# Altium PCB PZEM-004T.PcbDoc
Units mil, origin at the board's own origin, x right, y up, seen from the top; angles counter-clockwise.
Board outline 1850 x 840 mil, 2 copper layers (Top Layer, Bottom Layer); 45 components, 30 nets, 119 pads, 0 vias.
Unrouted connection lines stored in the file: 83.
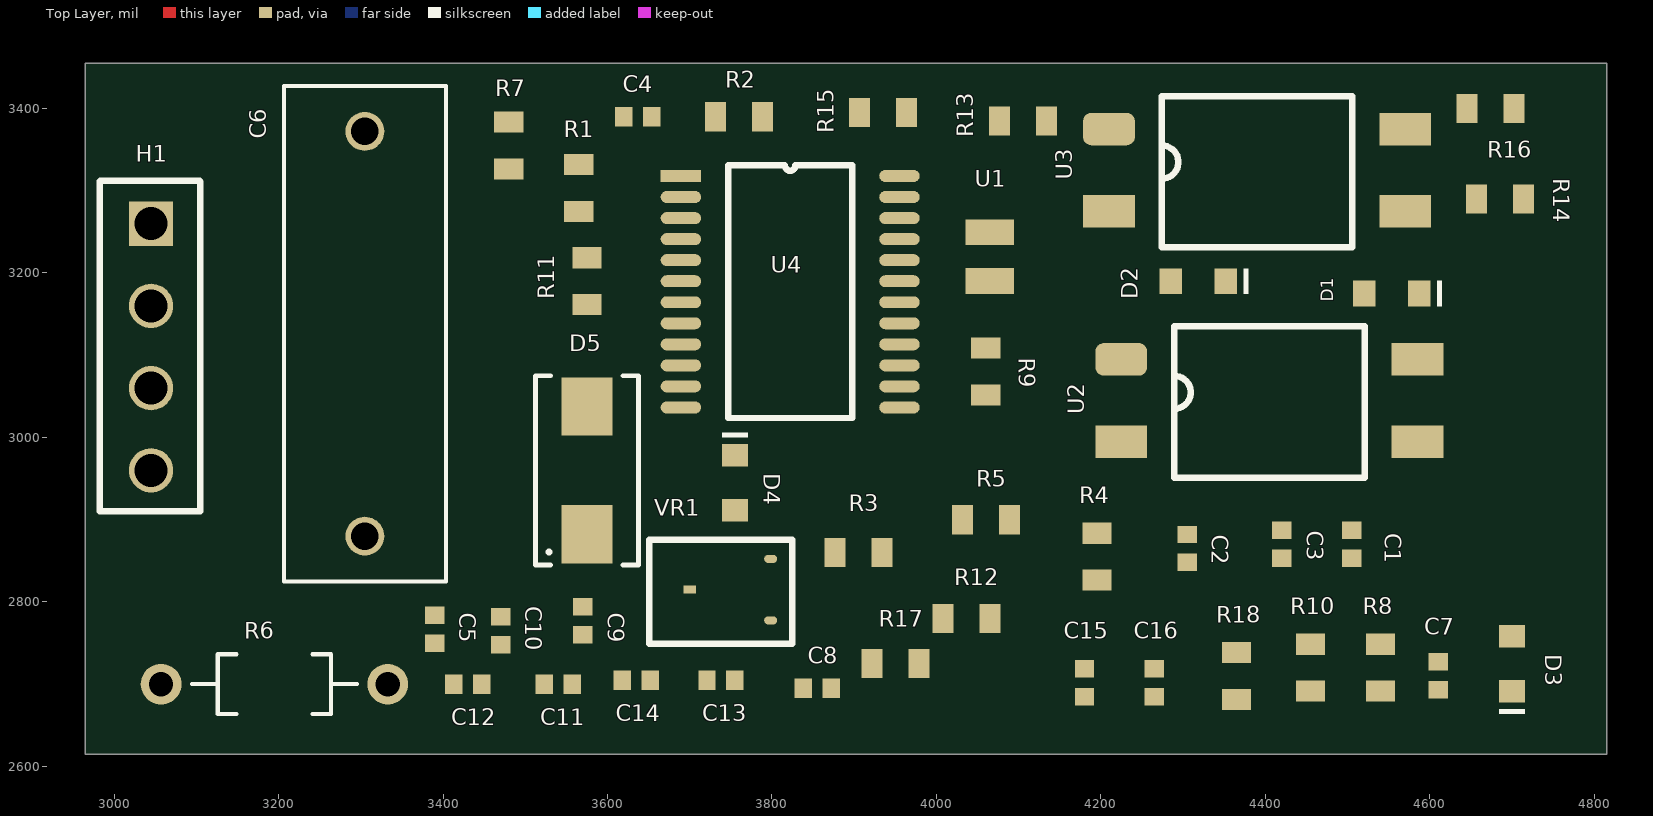
[diagram p0: Top Layer view]
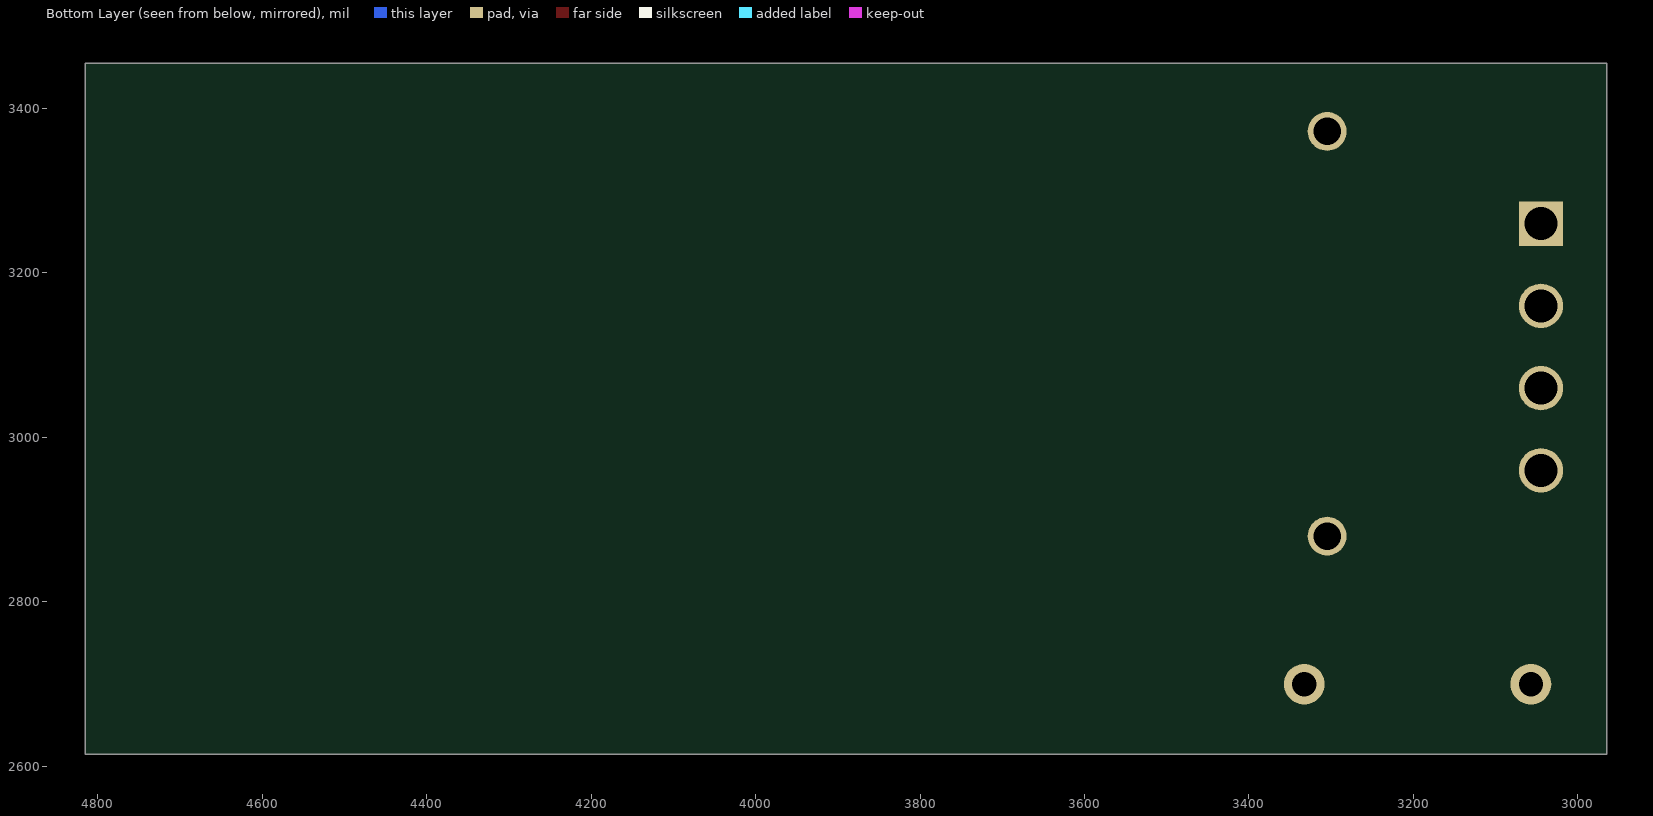
[diagram p1: Bottom Layer view, seen from below]

## Layer stack, top to bottom
Top Solder: solder mask 0.4, Solder Resist, Dk 3.5
Top Layer: signal copper 1.4
Dielectric 1: dielectric 12.6, FR-4, Dk 4.8
Bottom Layer: signal copper 1.4
Bottom Solder: solder mask 0.4, Solder Resist, Dk 3.5

## Board outline
2965,2615 2965,3455 4815,3455 4815,2615

## Design rules (kind name [scope] priority, off if disabled: settings)
Clearance [All] p1: gap=10 ignorepadtopadclearanceinfootprint=FALSE
PolygonConnect [All] p1: connectstyle=Relief reliefconductorwidth=10 reliefentries=4 polygonreliefangle="90 Angle" airgapwidth=10
RoutingVias [All] p1: holewidth=28 width=50 viastyle="Through Hole" minholewidth=5 minwidth=5 maxholewidth=28 maxwidth=50
SolderMaskExpansion [All] p1: expansion=4 istentingtop=FALSE
SupplyNets "Schematic Supply Nets" [InNet('CONN')] p1: voltage=0.000
Width [All] p1: maxlimit=10 minlimit=10 preferedwidth=10
30 further rules are at their usual default settings.

## Components (designator, comment, footprint, x,y, rotation, side; value= is the part's Value field where it differs from the comment)
C1 "10uf" CAPC1005X55N 4505,2870 r270 top
C2 "10uf" CAPC1005X55N 4305,2865 r90 top
C3 "10uf" CAPC1005X55N 4420,2870 r90 top
C4 "1uf" CAPC1005X55N 3637.01,3390 r180 top
C5 "10uf" CAPC1005X55N 3390,2767.01 r270 top
C6 "0.47nf" CAPRR1250W60L1530T500H1150 3305,3126.06 r90 top
C7 "470nf" CAPC1005X55N 4610,2710 r270 top
C8 "10uf" CAPC1005X55N 3855,2695 r0 top
C9 "4.7uf" CAPC1005X55N 3570,2777.01 r90 top
C10 "0.1uf" CAPC1005X55N 3470,2765 r90 top
C11 "10uf" CAPC1005X55N 3540,2700 r180 top
C12 "10uf" CAPC1005X55N 3430,2700 r0 top
C13 "10uf" CAPC1005X55N 3737.99,2705 r0 top
C14 "470uf" CAPC1005X55N 3635,2705 r0 top
C15 "10uf" CAPC1005X55N 4180,2702.01 r90 top
C16 "10uf" CAPC1005X55N 4265,2702.01 r90 top
D1 "LED_" WL-SMCW_0603_150060xx8x000 4553.46,3175 r180 top
D2 "LED_" WL-SMCW_0603_150060xx8x000 4318.47,3190 r180 top
D3 "LED_" WL-SMCW_0603_150060xx8x000 4700,2725 r90 top
D4 "dIODE" WL-SMCW_0603_150060xx8x000 3755,2945 r270 top
D5 "12 V" SMA_DIO-L 3575,2960 r90 top
H1 "HEADER X 4" DIP4 3045,3260 r0 top
R1 "100R" RESISTOR 3565,3303.54 r90 top
R2 "0.05R" RESISTOR 3760,3390 r180 top
R3 "210R" RESISTOR 3905,2860 r180 top
R4 "100R" RESISTOR 4195,2855 r270 top
R5 "1K" RESISTOR 4060,2900 r0 top
R6 "1M" RESAD700W45L350D185 3195,2700 r0 top
R7 "750R" RESISTOR 3480,3355 r90 top
R8 "470K" RESISTOR 4540,2720 r90 top
R9 "10K" RESISTOR 4060,3080 r270 top
R10 "100R" RESISTOR 4455,2720 r270 top
R11 "10k" RESISTOR 3575,3190 r270 top
R12 "4.7K" RESISTOR 4036.46,2780 r0 top
R13 "1K" RESISTOR 4105,3385 r0 top
R14 "1K" RESISTOR 4685,3290 r0 top
R15 "1K" RESISTOR 3935,3395 r0 top
R16 "1K" RESISTOR 4673.54,3400 r0 top
R17 "68K" RESISTOR 3950,2725 r180 top
R18 "10K" RESISTOR 4365,2710 r90 top
U1 "CM200C32768HZFT" XTAL_CM8V-T1A-32.768KHZ-12.5PF-20PPM-TA-QA 4065,3220 r270 top
U2 "CT817C_Optocoupler" SOP4 4224.76,3095 r0 top
U3 "CT817C_Optocoupler" SOP4 4209.76,3375 r0 top
U4 "V9881D" "SOP24 - DUPLICATE" 3689.25,3317.95 r0 top
VR1 "HT7133-1" SOP3 3700,2777.6 r90 top

## Footprints (in the part's own frame and the unit in brackets; to place one, negate y for a bottom-side part, rotate by r counter-clockwise, add the part's x,y. Pads: shape width x height; smd on the part's side, far side on the other; paste and mask are expansions set on the pad)
CAPC1005X55N [mm]
  rect 0.54x0.6 smd mask+0.02: 1(-0.432,0) 2(0.432,0)
  body extent -0.45,-0.22 0.55,0.28
CAPRR1250W60L1530T500H1150 [mm]
  round 1.2 hole 0.85: 1(-6.25,0) 2(6.25,0)
  silkscreen extent -7.65,-2.5 7.65,2.5, body extent -7.64,-2.47 7.66,2.53, height 11.5
DIP4 [mm]
  rect 1.37x1.37 hole 1.02: 1(0,0)
  round 1.37 hole 1.02: 2(0,-2.54) 3(0,-5.08) 4(0,-7.62)
  silkscreen extent -1.59,-8.89 1.52,1.32
RESAD700W45L350D185 [mm]
  round 1.258 hole 0.75: 1(-3.5,0) 2(3.5,0)
  silkscreen extent -2.55,-0.93 2.55,0.93, body extent -3.72,-0.92 3.72,0.92, height 1.85
RESISTOR [mm]
  rect 0.65x0.9 smd: 1(-0.725,0) 2(0.725,0)
  body extent -0.8,-0.4 0.8,0.4, height 0.45
SMA_DIO-L [mil]
  rect 70.84x62.17 smd paste+0 mask+0: 1(-77.62,0) 2(77.62,0)
  silkscreen extent -115,-62 115,62, body extent -110,-57 110,57, height 93
SOP3 [mm]
  rect 0.25x0.4 smd: 1(0.95,0)
  oval 0.25x0.4 smd: 2(0,-2.5) 3(1.9,-2.5)
  silkscreen extent -0.73,-3.16 2.49,1.25
SOP4 [mm]
  rrect50% 1.6x1 smd: 1(0,0)
  rect 1.6x1 smd: 2(0,-2.54) 3(9.15,-2.54) 4(9.15,0)
  silkscreen extent 1.63,-3.66 7.52,1.02, body extent -0.61,-3.85 9.85,1.26, height 4.6
"SOP24 - DUPLICATE" [mm]
  rect 1.25x0.37 smd: 1(0,0)
  oval 1.25x0.37 smd: 2(0,-0.65) 3(0,-1.3) 4(0,-1.95) 5(0,-2.6) 6(0,-3.25) 7(0,-3.9) 8(0,-4.55) 9(0,-5.2) 10(0,-5.85) 11(0,-6.5) 12(0,-7.15) 13(6.75,-7.15) 14(6.75,-6.5) 15(6.75,-5.85) 16(6.75,-5.2) 17(6.75,-4.55) 18(6.75,-3.9) 19(6.75,-3.25) 20(6.75,-2.6) 21(6.75,-1.95) 22(6.75,-1.3) 23(6.75,-0.65) 24(6.75,0)
  silkscreen extent 1.46,-7.47 5.29,0.33, body extent -0.55,-7.66 7.22,0.54, height 1.99
WL-SMCW_0603_150060xx8x000 [mm] "SMD Mono-color Chip LED, body 1.6x0.8mm"
  rect 0.7x0.8 smd: 1(-0.85,0) 2(0.85,0)
  silkscreen extent -1.55,-0.4 -1.4,0.4, body extent -0.8,-0.4 0.8,0.4, height 0.95
XTAL_CM8V-T1A-32.768KHZ-12.5PF-20PPM-TA-QA [mm]
  rect 0.8x1.5 smd: 1(-0.75,0) 2(0.75,0)
  body extent -1,-0.6 1,0.6, height 0.6

## Part data
C1 C2 C3 C4 C5 C6 C7 C8 C9 C10 C11 C12 C13 C14 C15 C16: library part capacitor, "CAP CER 10UF 6.3V X5R 0402", Manufacturer="Murata Electronics", Manufacturer Product Number=GRM155R60J106ME47D, Supplier part number=490-13239-1-ND, supplier=DigiKey
D1 D2 D3: "LED GREEN CLEAR 0805 SMD", Manufacturer="Lumex Opto/Components Inc.", Manufacturer Product Number=SML-LX0805UPGC-TR, supplier=DigiKey, supplier product number=67-1640-2-ND
D5: library part ZENER, "Zener Diode 12 V 1 W ±5% Surface Mount SMA", Manufacturer="Diodes Incorporated", Manufacturer Product Number=SMAZ12-13-F, supplier=DigiKey, supplier product number=SMAZ12-FDICT-ND
R1 R2 R3 R4 R5 R6 R7 R8 R9 R10 R11 R12 R13 R14 R15 R16 R17 R18: library part Resistor, "RES 10K OHM 5% 1/4W 1206", Manufacturer="TE Connectivity Passive Product", Manufacturer Product Number=CRGCQ1206J10K, Supplier part number=A130183CT-ND, supplier=DigiKey
U1: "32.768 kHz ±5ppm Crystal 12.5pF 50 kOhms 4-SOJ, 5.50mm pitch", Manufacturer="Citizen Finedevice Co Ltd", Manufacturer Product Number=CM200C32768HZFT, supplier=DigiKey, supplier product number=300-8742-1-ND
U2 U3: "35V 5kV 50mA 100mV@1mA,20mA 1 6V 1.24V DC SOP-4-2.54mm Transistor, Photovoltaic Output Optoisolators ROHS", Manufacturer="CT Micro International", Manufacturer Product Number=CT817C(SL)(T1)-H
U4: "V9881D SSOP24 Three-phase Multifunctional Metering Chip Energy Metering V9881"
VR1: "Linear Voltage Regulator IC Positive Fixed 1 Output 100mA SOT-89-3", Manufacturer=UMW, Manufacturer Product Number=HT7133-1, supplier=DigiKey, supplier product number=4518-HT7133-1CT-ND

## Nets (pads, with @x,y where several pads share a name; then routed paths per layer and width w, separated by ;. In a path a pad name is that pad's centre, name@x,y a point inside that pad or via, vN(x,y) a via of type N, cw(c..) or ccw(c..) an arc to the next point about the centre after c; other vN are vias at no path point)
+5V: R13.1 R14.1 R15.1 R16.1
ANODE: D1.2 R13.2 U3.1
CONN: C1.2 C3.2 C4.2 C5.2 C6.1 C8.1 C9.1 C10.1 C11.1 C12.1 C13.1 C14.1 C15.1 C16.1 D3.2 D5.1 H1.2 H1.3 R2.2 R4.2 R7.2 R18.1 U2.3 U4.12 VR1.1
CT_1: H1.1 R1.2 R2.1
CTI: U1.2 U4.20
CTO: U1.1 U4.21
DVCC: C9.2 C10.2 U4.13
IAN: C2.1 C3.1 R4.1 U4.3
IAP: C1.1 C2.2 R1.1 U4.2
L: C7.2 H1.4 R6.1 R8.1
LDO33: C11.2 C12.2 R9.2 U4.14
MODE1: R11.2 U4.6
NetC4_1: C4.1 U4.24
NetC5_1: C5.1 R9.1 U4.19
NetC7_1: C7.1 R8.2 R10.1
NetC14_2: C14.2 C15.2 D4.2 R17.2 VR1.2
NetD1_1: D1.1 R14.2
NetD2_1: D2.1 R16.2
NetD3_1: D3.1 R12.2
NetD4_1: D4.1 D5.2 R10.2
NetR3_1: R3.1 U2.1
NetU4_4: U4.4 U4.5
RX: U3.2
RXD: R5.1 U3.4 U4.17
T2: U3.3 U4.18
TX: D2.2 R15.2 U2.4
TXD: U2.2 U4.16
UP: C6.2 R6.2 R7.1 U4.1
VDCIN: C16.2 R17.1 R18.2 U4.22
VDD5: C8.2 C13.2 R3.2 R5.2 R11.1 R12.1 U4.23 VR1.3
pads on no net: U4.7 U4.8 U4.9 U4.10 U4.11 U4.15